# EAGLE board barath pcb 4 (EAGLE 6.5.0)
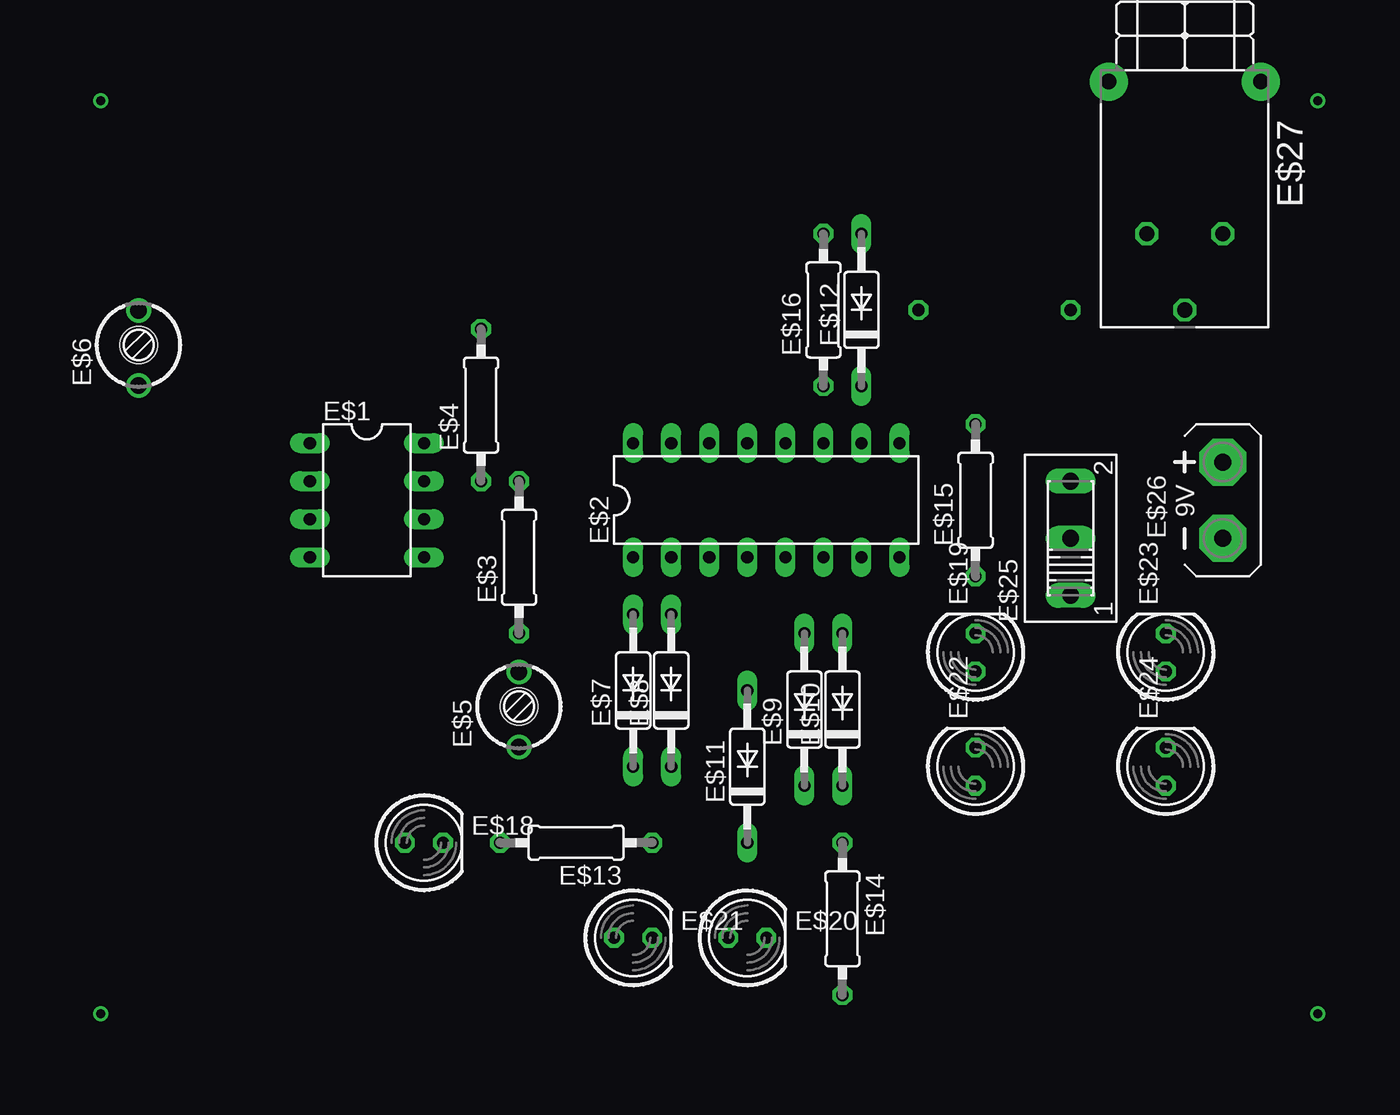
[diagram p0: board, top side]
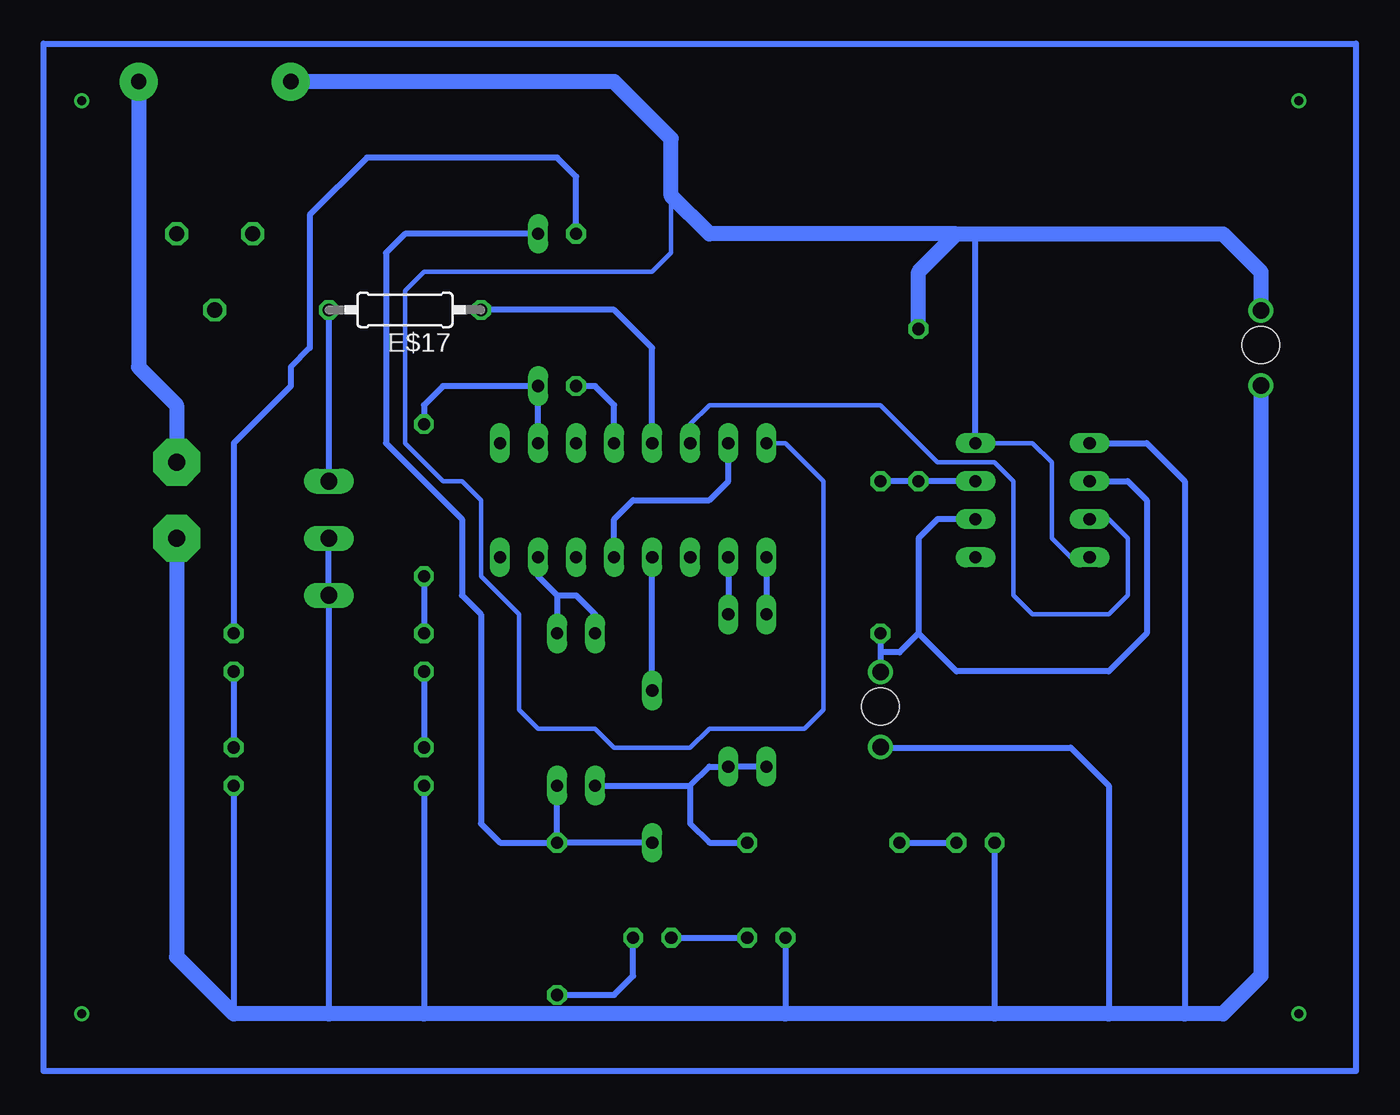
[diagram p1: board, bottom side, seen from below]

No outline drawn. Coordinates in mm, seen from the top.
Copper layers (1*16): Top 0.035mm / dielectric 1.5mm / Bottom 0.035mm
Design rules "default": minimum track width 10mil, minimum drill 24mil, track to track 8mil, track to pad 8mil, pad to pad 8mil, via to via 8mil, smd to smd 8mil, copper to edge 40mil, drill to drill 8mil, minimum pad ring 10mil, minimum via ring 8mil, stop-mask expansion 4mil, vias tented up to drill 0mil, thermal gap 10mil

## Footprints (pad centres in the part's own frame; a part is rotated, then mirrored left to right if it is on the bottom)
DIL08 = drill 0.813 long: 1 -3.81,-3.81; 2 -1.27,-3.81; 3 1.27,-3.81; 4 3.81,-3.81; 5 3.81,3.81; 6 1.27,3.81; 7 -1.27,3.81; 8 -3.81,3.81
DIL16 = drill 0.813 long: 1 -8.89,-3.81; 2 -6.35,-3.81; 3 -3.81,-3.81; 4 -1.27,-3.81; 5 1.27,-3.81; 6 3.81,-3.81; 7 6.35,-3.81; 8 8.89,-3.81; 9 8.89,3.81; 10 6.35,3.81; 11 3.81,3.81; 12 1.27,3.81; 13 -1.27,3.81; 14 -3.81,3.81; 15 -6.35,3.81; 16 -8.89,3.81
0207/10 = drill 0.813 octagon: 1 -5.08,0; 2 5.08,0
CTRIM3050.505 = drill 1.1: 1 -2.5,0; 2 2.5,0 | hole 2.5: 0.2,0
C2992 = drill 0.813 long: A 5.08,0; C -5.08,0
LED5MM = drill 0.813 octagon: A -1.27,0; K 1.27,0
255SB = drill 1.118 long: 1 -3.81,0; 2 0,0; 3 3.81,0
AB9V = drill 1.118 pad 3.15 octagon: + 0,2.54; - 0,-2.54
316-917 = drill 1.016 octagon: 1 10.16,2.54; 2 15.24,0; 3 10.16,-2.54 | drill 1.016 pad 2.54: B 0,-5.08; B1 0,5.08

## Placement (x,y rotation side)
E$1  [DIL08]  21.59,43.18 270 top
E$2  [DIL16]  48.26,43.18 0 top
E$3  [0207/10]  31.75,39.37 90 top
E$4  [0207/10]  29.21,49.53 90 top
E$5  [CTRIM3050.505]  31.75,29.21 90 top
E$6  [CTRIM3050.505]  6.35,53.34 90 top
E$7  [C2992]  39.37,30.48 90 top
E$8  [C2992]  41.91,30.48 90 top
E$9  [C2992]  50.8,29.21 90 top
E$10  [C2992]  53.34,29.21 90 top
E$11  [C2992]  46.99,25.4 90 top
E$12  [C2992]  54.61,55.88 90 top
E$13  [0207/10]  35.56,20.32 180 top
E$14  [0207/10]  53.34,15.24 270 top
E$15  [0207/10]  62.23,43.18 90 top
E$16  [0207/10]  52.07,55.88 90 top
E$17  [0207/10]  63.5,55.88 180 bottom
E$18  [LED5MM]  25.4,20.32 0 top
E$19  [LED5MM]  62.23,33.02 90 top
E$20  [LED5MM]  46.99,13.97 0 top
E$21  [LED5MM]  39.37,13.97 0 top
E$22  [LED5MM]  62.23,25.4 90 top
E$23  [LED5MM]  74.93,33.02 90 top
E$24  [LED5MM]  74.93,25.4 90 top
E$25  [255SB]  68.58,40.64 90 top
E$26  [AB9V]  78.74,43.18 0 top
E$27  [316-917]  76.2,71.12 270 top

## Library data of the parts
E$1 E$2 = ic-package
E$3-E$6 E$13-E$17 = resistor
E$7-E$12 = diode
E$18-E$24 = led
E$25 E$27 = switch
E$26 = battery

## Nets
S$2: E$2.4 E$11.A
S$3: E$1.1 E$18.A E$21.A E$22.A E$24.A E$25.1 E$25.2 E$26.-
S$4: E$1.7 E$3.2 E$4.1
S$5: E$14.2 E$20.K
S$6: E$2.5 E$2.15
S$8: E$20.A E$21.K
S$9: E$15.1 E$19.K
S$10: E$2.1 E$7.A
S$11: E$2.2 E$8.A
S$12: E$26.+ E$27.B1
S$13: E$2.7 E$9.A E$10.A
S$14: E$7.C E$8.C E$9.C E$13.1
S$15: E$10.C E$11.C E$12.A E$14.1
S$16: E$2.10 E$12.C E$15.2
S$17: E$2.12 E$16.1
S$18: E$13.2 E$18.K
S$19: E$19.A E$22.K
S$21: E$1.4 E$1.8 E$2.16 E$4.2 E$27.B
S$22: E$1.2 E$1.6 E$3.1
S$23: E$16.2 E$23.K
S$24: E$23.A E$24.K
S$25: E$2.13 E$17.1
S$30: E$17.2 E$25.3
S$31: E$1.3 E$2.14

## Tracks (layer width: path | path; a pad name or v marks a point on that pad's centre or on a via)
S$1
  Bottom 0.406: 0,5.08 87.63,5.08 87.63,73.66 0,73.66 0,5.08
S$2
  Bottom 0.406: E$11.A E$2.4
S$3
  Bottom 0.406: E$25.2 E$25.1 68.58,8.89 | E$1.1 13.97,46.99 11.43,44.45 11.43,8.89 | 31.75,26.67 19.05,26.67 16.51,24.13 16.51,8.89 | E$18.A 24.13,8.89 | E$22.A 62.23,8.89 | E$24.A 74.93,8.89 | E$21.A 38.1,8.89
  Bottom 1.016: 6.35,50.8 6.35,11.43 8.89,8.89 11.43,8.89 16.51,8.89 24.13,8.89 38.1,8.89 62.23,8.89 68.58,8.89 74.93,8.89 78.74,12.7 E$26.-
S$4
  Bottom 0.406: E$1.7 E$4.1 E$3.2
S$5
  Bottom 0.406: E$14.2 49.53,10.16 48.26,11.43 E$20.K
S$6
  Bottom 0.406: E$2.5 49.53,41.91 48.26,43.18 43.18,43.18 41.91,44.45 E$2.15
S$7  (via drill 0.6)
  other vias: 3.81,69.85
S$8
  Bottom 0.406: E$20.A E$21.K
S$9
  Bottom 0.406: E$15.1 E$19.K
S$10
  Bottom 0.406: E$2.1 E$7.A
S$11
  Bottom 0.406: E$2.2 E$8.A
S$12
  Bottom 1.016: E$27.B1 81.28,52.07 78.74,49.53 E$26.+
S$13
  Bottom 0.406: 53.34,36.83 E$10.A | E$2.7 54.61,38.1 53.34,36.83 | E$9.A 50.8,35.56 52.07,36.83 53.34,36.83
S$14
  Bottom 0.406: E$9.C 44.45,24.13 | 44.45,24.13 43.18,25.4 E$8.C E$7.C | 44.45,24.13 44.45,21.59 43.18,20.32 E$13.1
S$15
  Bottom 0.406: E$12.A 63.5,60.96 64.77,59.69 64.77,46.99 59.69,41.91 59.69,36.83 58.42,35.56 58.42,21.59 57.15,20.32 E$14.1 | E$14.1 E$10.C | E$11.C E$14.1
S$16
  Bottom 0.406: E$2.10 E$12.C 60.96,50.8 62.23,49.53 E$15.2
S$17
  Bottom 0.406: E$2.12 49.53,49.53 50.8,50.8 E$16.1
S$18
  Bottom 0.406: E$13.2 E$18.K
S$19
  Bottom 0.406: E$19.A E$22.K
S$21
  Bottom 0.305: E$1.8 21.59,46.99 20.32,45.72 20.32,40.64 19.05,39.37 E$1.4 | E$2.16 38.1,46.99 35.56,44.45 35.56,29.21 36.83,27.94 43.18,27.94 44.45,26.67 49.53,26.67 50.8,27.94 54.61,27.94 55.88,29.21 55.88,35.56 58.42,38.1 58.42,43.18 59.69,44.45 60.96,44.45 63.5,46.99 63.5,57.15 62.23,58.42 46.99,58.42 45.72,59.69 45.72,63.5
  Bottom 0.406: E$1.8 25.4,60.96
  Bottom 1.016: E$4.2 29.21,58.42 26.67,60.96 | 6.35,55.88 6.35,58.42 8.89,60.96 25.4,60.96 26.67,60.96 | 26.67,60.96 43.18,60.96 45.72,63.5 45.72,67.31 46.99,68.58 49.53,71.12 E$27.B
S$22
  Bottom 0.406: E$1.2 15.24,44.45 13.97,43.18 13.97,34.29 16.51,31.75 26.67,31.75 29.21,34.29 | E$1.6 27.94,41.91 29.21,40.64 29.21,34.29 | 29.21,34.29 30.48,33.02 31.75,33.02 | E$3.1 31.75,33.02 | 31.75,33.02 31.75,31.75
S$23
  Bottom 0.406: E$16.2 52.07,64.77 53.34,66.04 66.04,66.04 69.85,62.23 69.85,53.34 71.12,52.07 71.12,50.8 74.93,46.99 E$23.K
S$24
  Bottom 0.406: E$23.A E$24.K
S$25
  Bottom 0.406: E$2.13 46.99,53.34 49.53,55.88 E$17.1
S$27  (via drill 0.6)
  other vias: 85.09,69.85
S$28  (via drill 0.6)
  other vias: 85.09,8.89
S$29  (via drill 0.6)
  other vias: 3.81,8.89
S$30
  Bottom 0.406: E$17.2 E$25.3
S$31
  Bottom 0.305: E$1.3 16.51,41.91 15.24,40.64 15.24,36.83 16.51,35.56 21.59,35.56 22.86,36.83 22.86,44.45 24.13,45.72 27.94,45.72 31.75,49.53 43.18,49.53 44.45,48.26 E$2.14